# Altium PCB RAVEN 1.0.PcbDoc
Units mm, origin at the board's own origin, x right, y up, seen from the top; angles counter-clockwise.
Board outline 40 x 22 mm, 2 copper layers (F.Cu, B.Cu); 20 components, 43 nets, 89 pads, 10 vias.
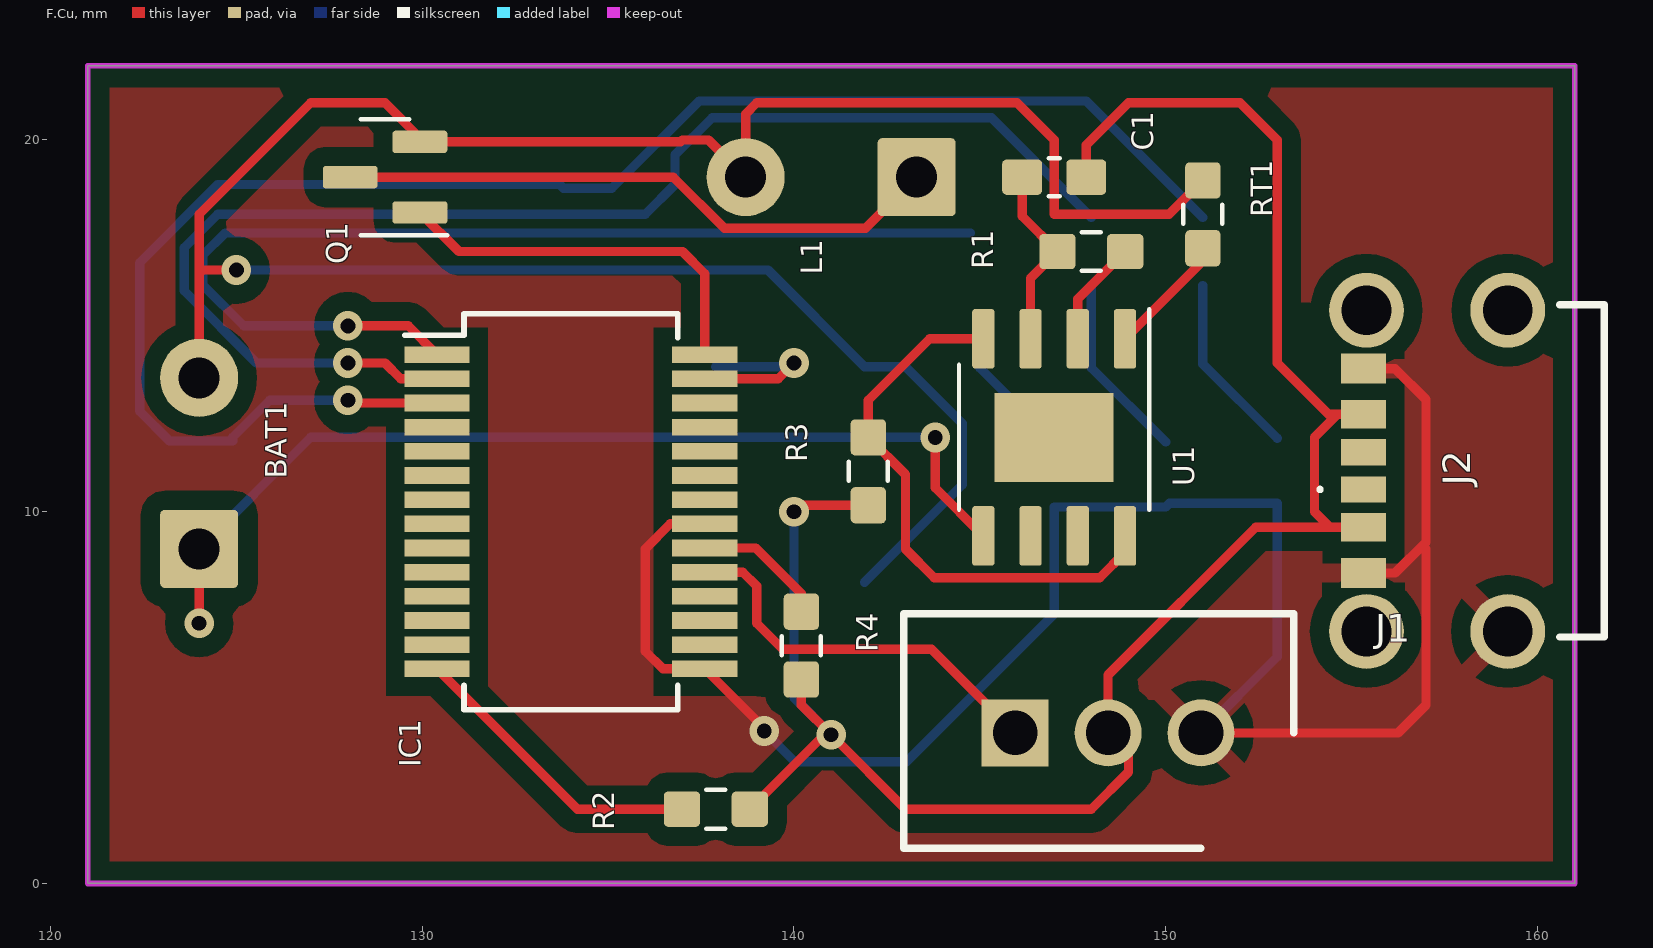
[diagram p0: F.Cu view]
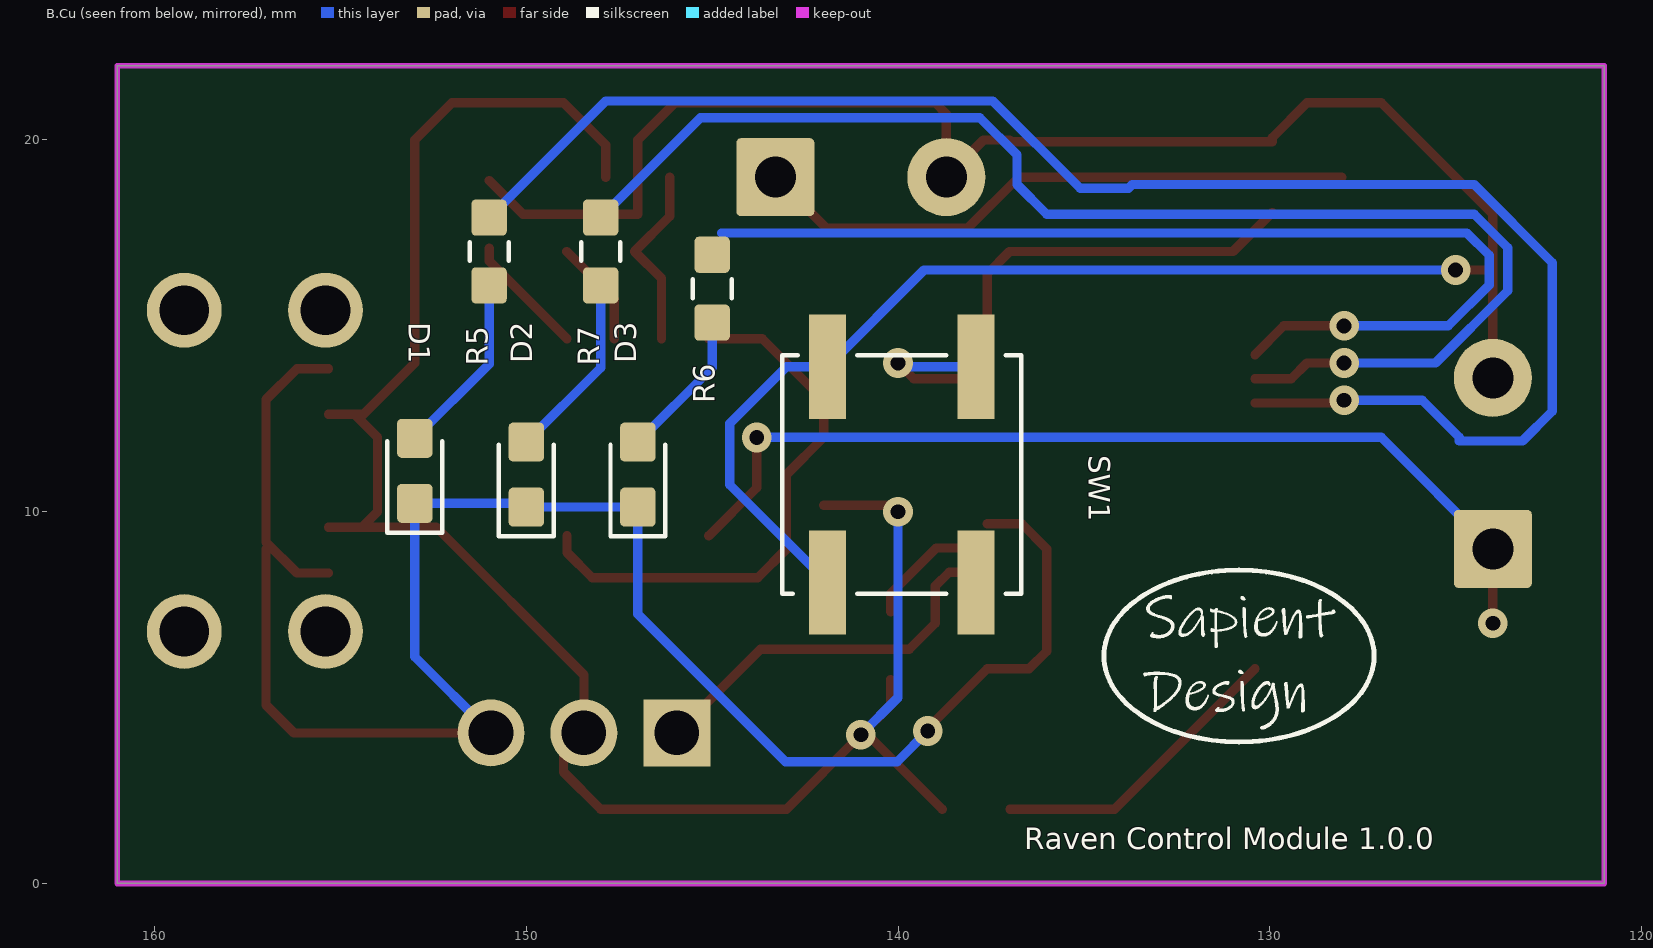
[diagram p1: B.Cu view, seen from below]

## Layer stack, top to bottom
F.Mask: solder mask 0.0102, Solder Resist, Dk 3.5
F.Cu: signal copper 0.0356
Dielectric 1: dielectric 0.32, FR-4, Dk 4.8
B.Cu: signal copper 0.0356
B.Mask: solder mask 0.0102, Solder Resist, Dk 3.5

## Board outline
121,22 121,0 161,0 161,22 121,22

## Design rules (kind name [scope] priority, off if disabled: settings)
Clearance "Clearence 0.508_Polygon" [InNamedPolygon('F.Cu-Net-(D1-Pad1)')] p1: gap=0.508 ignorepadtopadclearanceinfootprint=FALSE
MinimumSolderMaskSliver [All] p1: minsoldermaskwidth=0
PolygonConnect Polygon_F.Cu-Net-(D1-Pad1)_ConnectDirect [IsNamedPolygon('F.Cu-Net-(D1-Pad1)') vs IsVia] p1: connectstyle=Direct reliefconductorwidth=0.254 reliefentries=4 polygonreliefangle="90 Angle" airgapwidth=0.254
PolygonConnect Polygon_F.Cu-Net-(D1-Pad1)_ConnectRelief45 [IsNamedPolygon('F.Cu-Net-(D1-Pad1)') vs (IsThruPin or IsSMTPin) and (PadShape_AllLayers = 'Round')] p2: connectstyle=Relief reliefconductorwidth=0.508 reliefentries=4 polygonreliefangle="45 Angle" airgapwidth=0.508
PolygonConnect Polygon_F.Cu-Net-(D1-Pad1)_ConnectRelief90 [IsNamedPolygon('F.Cu-Net-(D1-Pad1)') vs (IsThruPin or IsSMTPin) and (PadShape_AllLayers <> 'Round')] p3: connectstyle=Relief reliefconductorwidth=0.508 reliefentries=4 polygonreliefangle="90 Angle" airgapwidth=0.508
RoutingVias [All] p1: holewidth=0.711 width=1.27 viastyle="Through Hole" minholewidth=0.711 minwidth=1.27 maxholewidth=0.711 maxwidth=1.27
SilkToSilkClearance [All] p1: silktosilkclearance=0
SilkToSolderMaskClearance [IsPad] p1: minsilkscreentomaskgap=0 clearancetoexposedcopper=TRUE
SolderMaskExpansion [All] p1: expansion=0.102 istentingtop=FALSE
Width [All] p1: maxlimit=10 minlimit=0.254 preferedwidth=0.254 minimp=50.000000 maximp=50.000000 favimp=50.000000
27 further rules are at their usual default settings.

## Components (designator, comment, footprint, x,y, rotation, side; value= is the part's Value field where it differs from the comment)
BAT1 "Battery_Cell" SolderWire-0.5sqmm_1x02_P4.6mm_D0.9mm_OD2.1mm 124,9 r90 top
C1 "10uf" C_0603_1608Metric_Pad1.08x0.95mm_HandSolder 147,19 r0 top
D1 "LED" LED_0603_1608Metric_Pad1.05x0.95mm_HandSolder 153,11.1 r270 bottom
D2 "LED" LED_0603_1608Metric_Pad1.05x0.95mm_HandSolder 150,11 r270 bottom
D3 "LED" LED_0603_1608Metric_Pad1.05x0.95mm_HandSolder 147,11 r270 bottom
IC1 "ATMEGA3208-XFR" SSOP-28_5.3x10.2mm_P0.65mm 134,10 r0 top
J1 "UPDI HEADER" SHDR3W69P0X250_1X3_1000X600X790P 150.95,4.05 r0 top
J2 "USB_C_Receptacle_USB2.0" USB4125GFA0190 158.4,11.1 r90 top
L1 "L" SolderWire-0.5sqmm_1x02_P4.6mm_D0.9mm_OD2.1mm 143.3,19 r180 top
Q1 "SI3402-TP" SOT-23 129,19 r180 top
R1 "1k" R_0603_1608Metric_Pad0.98x0.95mm_HandSolder#1 148,17 r180 top
R2 ".4" R_0603_1608Metric_Pad0.98x0.95mm_HandSolder#1 137.9,2 r0 top
R3 ".4" R_0603_1608Metric_Pad0.98x0.95mm_HandSolder#1 142,11.088 r270 top
R4 ".4" R_0603_1608Metric_Pad0.98x0.95mm_HandSolder#1 140.2,6.4 r90 top
R5 "R" R_0603_1608Metric_Pad0.98x0.95mm_HandSolder#2 151,17 r270 bottom
R6 "R" R_0603_1608Metric_Pad0.98x0.95mm_HandSolder#2 145,16 r270 bottom
R7 "R" R_0603_1608Metric_Pad0.98x0.95mm_HandSolder#2 148,17 r270 bottom
RT1 "NTCG163JF103FT1" R_0603_1608Metric_Pad0.98x0.95mm_HandSolder#1 151,18 r90 top
SW1 "TS02-66-43-BK-260-LCR-D" SW_Push_1P1T_NO_CK_KSC7xxJ 139.9,11 r90 bottom
U1 "TP4056" HTSOP-8-1EP_3.9x4.9mm_P1.27mm_EP2.4x3.2mm 147,12 r270 top

## Footprints (in the part's own frame and the unit in brackets; to place one, negate y for a bottom-side part, rotate by r counter-clockwise, add the part's x,y. Pads: shape width x height; smd on the part's side, far side on the other; paste and mask are expansions set on the pad)
C_0603_1608Metric_Pad1.08x0.95mm_HandSolder [mm]
  rrect25% 1.075x0.95 smd mask+0: 1(-0.863,0) 2(0.863,0)
  silkscreen extent -0.15,-0.51 0.15,0.51
HTSOP-8-1EP_3.9x4.9mm_P1.27mm_EP2.4x3.2mm [mm]
  rrect25% 1.6x0.6 smd mask+0: 1(-2.65,1.905) 2(-2.65,0.635) 3(-2.65,-0.635) 4(-2.65,-1.905) 5(2.65,-1.905) 6(2.65,-0.635) 7(2.65,0.635) 8(2.65,1.905)
  rect 2.4x3.2 smd paste-3.2 mask+0: 9(0,0)
  rrect25% 0.97x1.29 on Top Paste mask-1.29: Un1(0.6,0.8) Un2(-0.6,0.8) Un3(-0.6,-0.8) Un4(0.6,-0.8)
  silkscreen extent -3.45,-2.56 1.95,2.56
LED_0603_1608Metric_Pad1.05x0.95mm_HandSolder [mm]
  rrect25% 1.05x0.95 smd mask+0: 1(0.875,0) 2(-0.875,0)
  silkscreen extent -0.8,-0.73 1.66,0.73
R_0603_1608Metric_Pad0.98x0.95mm_HandSolder#1 [mm]
  rrect25% 0.975x0.95 smd mask+0: 1(-0.913,0) 2(0.913,0)
  silkscreen extent -0.25,-0.52 0.25,0.52
R_0603_1608Metric_Pad0.98x0.95mm_HandSolder#2 [mm]
  rrect25% 0.975x0.95 smd mask+0: 1(0.913,0) 2(-0.913,0)
  silkscreen extent -0.25,-0.52 0.25,0.52
SHDR3W69P0X250_1X3_1000X600X790P [mm]
  rect 1.8x1.8 hole 1.2 paste-2539.97 mask+0: 1(-5,0)
  round 1.8 hole 1.2 paste-2539.97 mask+0: 2(-2.5,0) 3(0,0)
  silkscreen extent -8,-3.1 2.5,3.2
SolderWire-0.5sqmm_1x02_P4.6mm_D0.9mm_OD2.1mm [mm]
  rrect12% 2.1x2.1 hole 1.1 paste-2539.97 mask+0: 1(0,0)
  round 2.1 hole 1.1 paste-2539.97 mask+0: 2(4.6,0)
SOT-23 [mm]
  rrect25% 1.475x0.6 smd mask+0: 1(-0.937,0.95) 2(-0.937,-0.95) 3(0.937,0)
  silkscreen extent -1.68,-1.56 0.65,1.56
SSOP-28_5.3x10.2mm_P0.65mm [mm]
  rect 1.75x0.45 smd mask+0: 1(-3.6,4.225) 2(-3.6,3.575) 3(-3.6,2.925) 4(-3.6,2.275) 5(-3.6,1.625) 6(-3.6,0.975) 7(-3.6,0.325) 8(-3.6,-0.325) 9(-3.6,-0.975) 10(-3.6,-1.625) 11(-3.6,-2.275) 12(-3.6,-2.925) 13(-3.6,-3.575) 14(-3.6,-4.225) 15(3.6,-4.225) 16(3.6,-3.575) 17(3.6,-2.925) 18(3.6,-2.275) 19(3.6,-1.625) 20(3.6,-0.975) 21(3.6,-0.325) 22(3.6,0.325) 23(3.6,0.975) 24(3.6,1.625) 25(3.6,2.275) 26(3.6,2.925) 27(3.6,3.575) 28(3.6,4.225)
  silkscreen extent -4.47,-5.33 2.88,5.33
SW_Push_1P1T_NO_CK_KSC7xxJ [mm]
  rect 2.8x1 smd mask+0: 1(-2.9,-2) 1(2.9,-2) 2(-2.9,2) 2(2.9,2)
  silkscreen extent -3.21,-3.21 3.21,3.21
USB4125GFA0190 [mm]
  rect 0.7x1.2 smd mask+0: A5(-0.5,3.08) B5(0.5,3.08)
  rect 0.76x1.2 smd mask+0: A9(1.52,3.08) B9(-1.52,3.08)
  rect 0.8x1.2 smd mask+0: A12(2.75,3.08) B12(-2.75,3.08)
  round 2.01 hole 1.34 paste-2539.97 mask+0: MH1(-4.32,3) MH2(-4.32,-0.8) MH3(4.32,-0.8) MH4(4.32,3)
  silkscreen extent -4.47,-3.4 4.47,4.3

## Part data
BAT1 L1: library part SolderWire-0.5sqmm_1x02_P4.6mm_D0.9mm_OD2.1mm, "Soldered wire connection, for 2 times 0.5 mm² wires, basic insulation, conductor diameter 0.9mm, outer diameter 2.1mm, size source Multi-Contact FLEXI-E 0.5 (https://ec.staubli.com/AcroFiles/Catalogues/TM_Cab-Main-11014119_(en)_hi.pdf), bend radius 3 times outer diameter, generated with kicad-footprint-generator", Sheetfile="RAVEN 1.0.kicad_sch"
C1: library part C_0603_1608Metric_Pad1.08x0.95mm_HandSolder, "Capacitor SMD 0603 (1608 Metric), square (rectangular) end terminal, IPC_7351 nominal with elongated pad for handsoldering. (Body size source: IPC-SM-782 page 76, https://www.pcb-3d.com/wordpress/wp-content/uploads/ipc-sm-782a_amendment_1_and_2.pdf), generated with kicad-footprint-generator", Sheetfile="RAVEN 1.0.kicad_sch"
D1 D2 D3: library part LED_0603_1608Metric_Pad1.05x0.95mm_HandSolder, "LED SMD 0603 (1608 Metric), square (rectangular) end terminal, IPC_7351 nominal, (Body size source: http://www.tortai-tech.com/upload/download/2011102023233369053.pdf), generated with kicad-footprint-generator", Sheetfile="RAVEN 1.0.kicad_sch"
IC1: library part SSOP-28_5.3x10.2mm_P0.65mm, "28-Lead Plastic Shrink Small Outline (SS)-5.30 mm Body [SSOP] (see Microchip Packaging Specification 00000049BS.pdf)", Manufacturer_Name=Microchip, Mouser Part Number=556-ATMEGA3208-XFR, Description="8-bit Microcontrollers - MCU 20MHz, 32KB, SSOP28, Ind 125C, Green, T&R", Height=1.99, Manufacturer_Part_Number=ATMEGA3208-XFR, Mouser Price/Stock=https://www.mouser.co.uk/ProductDetail/Microchip-Technology/ATMEGA3208-XFR?qs=y6ZabgHbY%252ByexExRqReahg%3D%3D, Sheetfile="RAVEN 1.0.kicad_sch"
J1: library part SHDR3W69P0X250_1X3_1000X600X790P, "DF1-3P-2.5DSA(05)", Arrow Part Number=2-1445050-3, Manufacturer_Name="TE Connectivity", Mouser Part Number=571-2-1445050-3, Arrow Price/Stock=https://www.arrow.com/en/products/2-1445050-3/te-connectivity?region=europe, Description="CONN HEADER 3MM 3POS TIN T/H", Height=9.44, Manufacturer_Part_Number=2-1445050-3, Mouser Price/Stock=https://www.mouser.co.uk/ProductDetail/TE-Connectivity-AMP/2-1445050-3?qs=2O%252BHHOJJxLFXv7raSz89Kg%3D%3D, Sheetfile="RAVEN 1.0.kicad_sch"
J2: library part USB4125GFA0190, "USB4125-GF-A-0190-2", Sheetfile="RAVEN 1.0.kicad_sch"
Q1: library part SOT-23, "SOT, 3 Pin (https://www.jedec.org/system/files/docs/to-236h.pdf variant AB), generated with kicad-footprint-generator ipc_gullwing_generator.py", Manufacturer_Name="Micro Commercial Components (MCC)", Mouser Part Number=833-SI3402-TP, Arrow Part Number=SI3402-TP, Arrow Price/Stock=https://www.arrow.com/en/products/si3402-tp/micro-commercial-components?region=europe, Description="MOSFET 30V,4A,N-CHANNEL MOSFET,SOT-23", Height=1.22, Manufacturer_Part_Number=SI3402-TP, Mouser Price/Stock=https://www.mouser.co.uk/ProductDetail/Micro-Commercial-Components-MCC/SI3402-TP?qs=y6ZabgHbY%252Bz%252BbnROIOEOVg%3D%3D, Sheetfile="RAVEN 1.0.kicad_sch"
R1 R2 R3 R4 R5 R6 R7: library part R_0603_1608Metric_Pad0.98x0.95mm_HandSolder, "Resistor SMD 0603 (1608 Metric), square (rectangular) end terminal, IPC_7351 nominal with elongated pad for handsoldering. (Body size source: IPC-SM-782 page 72, https://www.pcb-3d.com/wordpress/wp-content/uploads/ipc-sm-782a_amendment_1_and_2.pdf), generated with kicad-footprint-generator", Sheetfile="RAVEN 1.0.kicad_sch"
RT1: library part R_0603_1608Metric_Pad0.98x0.95mm_HandSolder, "Resistor SMD 0603 (1608 Metric), square (rectangular) end terminal, IPC_7351 nominal with elongated pad for handsoldering. (Body size source: IPC-SM-782 page 72, https://www.pcb-3d.com/wordpress/wp-content/uploads/ipc-sm-782a_amendment_1_and_2.pdf), generated with kicad-footprint-generator", Manufacturer_Name=TDK, Mouser Part Number=810-NTCG163JF103FT1, Arrow Part Number=NTCG163JF103FT1, Arrow Price/Stock=https://www.arrow.com/en/products/ntcg163jf103ft1/tdk?region=nac, Description="Chip NTC Thermistors (Sensor), Resistance (at 25?C)=10k?, Resistance Tolerance (at 25?C)=?1%", Height=0.9, Manufacturer_Part_Number=NTCG163JF103FT1, Mouser Price/Stock=https://www.mouser.co.uk/ProductDetail/TDK/NTCG163JF103FT1?qs=f0gCvUGw%252BIyUP%2FT8hD9VGA%3D%3D, Sheetfile="RAVEN 1.0.kicad_sch"
SW1: library part SW_Push_1P1T_NO_CK_KSC7xxJ, "CK components KSC7 tactile switch https://www.ckswitches.com/media/1973/ksc7.pdf", Manufacturer_Name="CUI Inc.", Mouser Part Number=179-TS026643BK260LCR, Arrow Part Number=TS02-66-43-BK-260-LCR-D, Arrow Price/Stock=https://www.arrow.com/en/products/ts02-66-43-bk-260-lcr-d/cui-devices?region=nac, Description="Tactile Switches 6 x 6 mm, 4.3 mm Act Height, 260 gf, Black, Long Crimped, Through Hole, SPST,", Height=4.5, Manufacturer_Part_Number=TS02-66-43-BK-260-LCR-D, Mouser Price/Stock=https://www.mouser.co.uk/ProductDetail/CUI-Devices/TS02-66-43-BK-260-LCR-D?qs=A6eO%252BMLsxmQi%252BNuzcShOvg%3D%3D, Sheetfile="RAVEN 1.0.kicad_sch"
U1: library part HTSOP-8-1EP_3.9x4.9mm_P1.27mm_EP2.4x3.2mm, "HTSOP, 8 Pin (https://media.digikey.com/pdf/Data%20Sheets/Rohm%20PDFs/BD9G341EFJ.pdf), generated with kicad-footprint-generator ipc_gullwing_generator.py", Manufacturer_Name="NanJing Top Power", Description="1A Standalone Linear Li-lon Battery Charger, SOP-8", Height=1.75, Manufacturer_Part_Number=TP4056, Sheetfile="RAVEN 1.0.kicad_sch"

## Via types
v1: diameter 0.8, hole 0.4, F.Cu to B.Cu, tented both sides, 10 vias

## Nets (pads, with @x,y where several pads share a name; then routed paths per layer and width w, separated by ;. In a path a pad name is that pad's centre, name@x,y a point inside that pad or via, vN(x,y) a via of type N, cw(c..) or ccw(c..) an arc to the next point about the centre after c; other vN are vias at no path point)
Net-(BAT1-Pad1): BAT1.1 U1.5 | length 26.2
  F.Cu w0.25: v1(124,7) BAT1.1 ; v1(143.8,12) 143.8,10.645 U1.5
  B.Cu w0.25: BAT1.1 127,12 v1(143.8,12)
Net-(BAT1-Pad2): BAT1.2 L1.2 Q1.2 RT1.2 SW1.2 | length 65.8
  F.Cu w0.25: BAT1.2 124,16.4 ; v1(125,16.5) 124.1,16.5 124,16.4 ; RT1.2 150.088,18 147,18 147,20 146,21 139,21 138.7,20.7 L1.2 137.7,20 137,20 136.95,19.95 Q1.2 129.937,20.062 129,21 127,21 124,18 124,16.4
  B.Cu w0.25: v1(125,16.5) 139.3,16.5 141.9,13.9 143,13.9 144.525,12.375 144.525,10.725 SW1.2@141.9,8.1
Net-(C1-Pad1): C1.1 R1.2 U1.3 | length 5
  F.Cu w0.25: C1.1 146.138,17.95 R1.2 146.365,16.278 U1.3
Net-(C1-Pad2): C1.2 J1.2 J2.A9 J2.B9 R2.2 R3.2 R4.1 | length 54.8
  F.Cu w0.25: R2.2 140.812,4 v1(141,4) ; v1(140,10) 140.175,10.175 R3.2 ; R4.1 140.2,4.8 v1(141,4) ; C1.2 147.863,19.863 149,21 152,21 153,20 153,14 154.38,12.62 J2.A9 154.62,12.62 154,12 154,10 154.42,9.58 J2.B9 152.42,9.58 148.45,5.61 J1.2 149,3.5 149,3 148,2 143,2 v1(141,4)
  B.Cu w0.25: v1(140,10) 140,5 v1(141,4)
Net-(D1-Pad1): D1.1 D2.1 D3.1 IC1.15 IC1.21 J1.3 J2.A12 J2.B12 J2.MH2 | length 52.9
  F.Cu w0.25: IC1.21 136.675,9.675 136,9 136,6.25 136.475,5.775 IC1.15 139.2,4.175 v1(139.2,4.1) ; J1.3 156.25,4.05 157,4.8 157,9 ; J2.B12 156.17,8.35 157,9.18 157,13.02 156.17,13.85 J2.A12
  B.Cu w0.25: v1(139.2,4.1) 140.025,3.275 143.025,3.275 146.875,7.125 147,7.25 D3.1 D2.1 150.1,10.225 D1.1 153,6.1 J1.3
Net-(D1-Pad2): D1.2 R5.1 | length 4.9
  B.Cu w0.25: R5.1 151,13.975 D1.2
Net-(D2-Pad2): D2.2 R7.1 | length 5
  B.Cu w0.25: R7.1 148,13.875 D2.2
Net-(D3-Pad2): D3.2 R6.1 | length 4
  B.Cu w0.25: R6.1 145,13.875 D3.2
Net-(IC1-Pad1): IC1.1 R6.2 | length 28.8
  F.Cu w0.25: v1(128,15) 129.625,15 IC1.1
  B.Cu w0.25: v1(128,15) 125.2,15 124.1,16.1 124.1,16.9 124.7,17.5 144.75,17.5
Net-(IC1-Pad2): IC1.2 R7.2 | length 36.4
  F.Cu w0.25: v1(128,14) 129,14 129.425,13.575 IC1.2
  B.Cu w0.25: v1(128,14) 125.545,14 123.6,15.945 123.6,17.1 124.5,18 136,18 136.8,18.8 136.8,19.6 137.8,20.6 145.313,20.6 R7.2
Net-(IC1-Pad3): IC1.3 R5.2 | length 44.7
  F.Cu w0.25: v1(128,13) 128.075,12.925 IC1.3
  B.Cu w0.25: v1(128,13) 125.9,13 124.9,12 124.9,11.9 123.2,11.9 122.4,12.7 122.4,16.7 124.5,18.8 133.7,18.8 133.8,18.7 135.1,18.7 137.45,21.05 146.05,21.05 147.863,21.05 R5.2
Net-(IC1-Pad14): IC1.14 R2.1 | length 8.2
  F.Cu w0.25: IC1.14 134.175,2 R2.1
Net-(IC1-Pad19): IC1.19 J1.1 | length 10.7
  F.Cu w0.25: IC1.19 138.625,8.375 139,8 139,7 139.7,6.3 143.7,6.3 J1.1
Net-(IC1-Pad20): IC1.20 R4.2 | length 3.6
  F.Cu w0.25: IC1.20 138.975,9.025 140.2,7.8 R4.2
Net-(IC1-Pad26): IC1.26
Net-(IC1-Pad27): IC1.27 SW1.1@137.9,13.9 | length 4.7
  F.Cu w0.25: IC1.27 139.575,13.575 v1(140,14)
  B.Cu w0.25: SW1.1@137.9,13.9 139.9,13.9 v1(140,14)
Net-(IC1-Pad28): IC1.28 Q1.1 | length 10.5
  F.Cu w0.25: Q1.1 130.988,17 137,17 137.6,16.4 IC1.28
Net-(L1-Pad1): L1.1 Q1.3 | length 16.4
  F.Cu w0.25: Q1.3 136.755,19 138.13,17.625 141.925,17.625 L1.1
Net-(R1-Pad1): R1.1 U1.2 | length 2.9
  F.Cu w0.25: U1.2 147.635,15.723 R1.1
Net-(R2-Pad1): R3.1 U1.4 U1.8 | length 15.1
  F.Cu w0.25: U1.4 143.65,14.65 142,13 R3.1 143,11 143,9 143.775,8.225 148.225,8.225 148.905,8.905 U1.8
Net-(RT1-Pad1): RT1.1 U1.1 | length 3.3
  F.Cu w0.25: U1.1 151,16.745 RT1.1
unconnected-(IC1-Pad4): IC1.4
unconnected-(IC1-Pad5): IC1.5
unconnected-(IC1-Pad6): IC1.6
unconnected-(IC1-Pad7): IC1.7
unconnected-(IC1-Pad8): IC1.8
unconnected-(IC1-Pad9): IC1.9
unconnected-(IC1-Pad10): IC1.10
unconnected-(IC1-Pad11): IC1.11
unconnected-(IC1-Pad12): IC1.12
unconnected-(IC1-Pad13): IC1.13
unconnected-(IC1-Pad16): IC1.16
unconnected-(IC1-Pad17): IC1.17
unconnected-(IC1-Pad18): IC1.18
unconnected-(IC1-Pad22): IC1.22
unconnected-(IC1-Pad23): IC1.23
unconnected-(IC1-Pad24): IC1.24
unconnected-(IC1-Pad25): IC1.25
unconnected-(J2-PadA5): J2.A5
unconnected-(J2-PadB5): J2.B5
unconnected-(U1-Pad6): U1.6
unconnected-(U1-Pad7): U1.7
unconnected-(U1-Pad9): U1.9
pads on no net: J2.MH1 J2.MH3 J2.MH4 SW1.1@137.9,8.1 U1.Un1 U1.Un2 U1.Un3 U1.Un4

## Polygon pours and split planes (outlines as drawn)
Net-(D1-Pad1) on F.Cu "F.Cu-Net-(D1-Pad1)" (solid, remove dead copper, pour order 0): 161,0 121,0 121,22 161,22

## Keep-outs
Edge.Cuts:
  lines w0.15: 121,0 161,0 ; 121,0 121,22 ; 121,0 161,0 ; 121,0 121,22 ; 121,22 161,22 ; 121,22 161,22 ; 161,0 161,22 ; 161,0 161,22

## Silkscreen, mask and mechanical layers (free items; w line width, h text height)
B.SilkS:
  drawing of 121 lines, arcs and shapes, not listed
  text "Raven Control Module 1.0.0" at 136.611,0.718 h1